# Altium PCB DPT2.3.PcbDoc
Units mm, origin at the board's own origin, x right, y up, seen from the top; angles counter-clockwise.
Board outline 79.3 x 71.2 mm, 4 copper layers (Top Layer, Layer 1, Layer 2, Bottom Layer), stack 1.491 mm thick; 139 components, 38 nets, 305 pads, 339 vias.
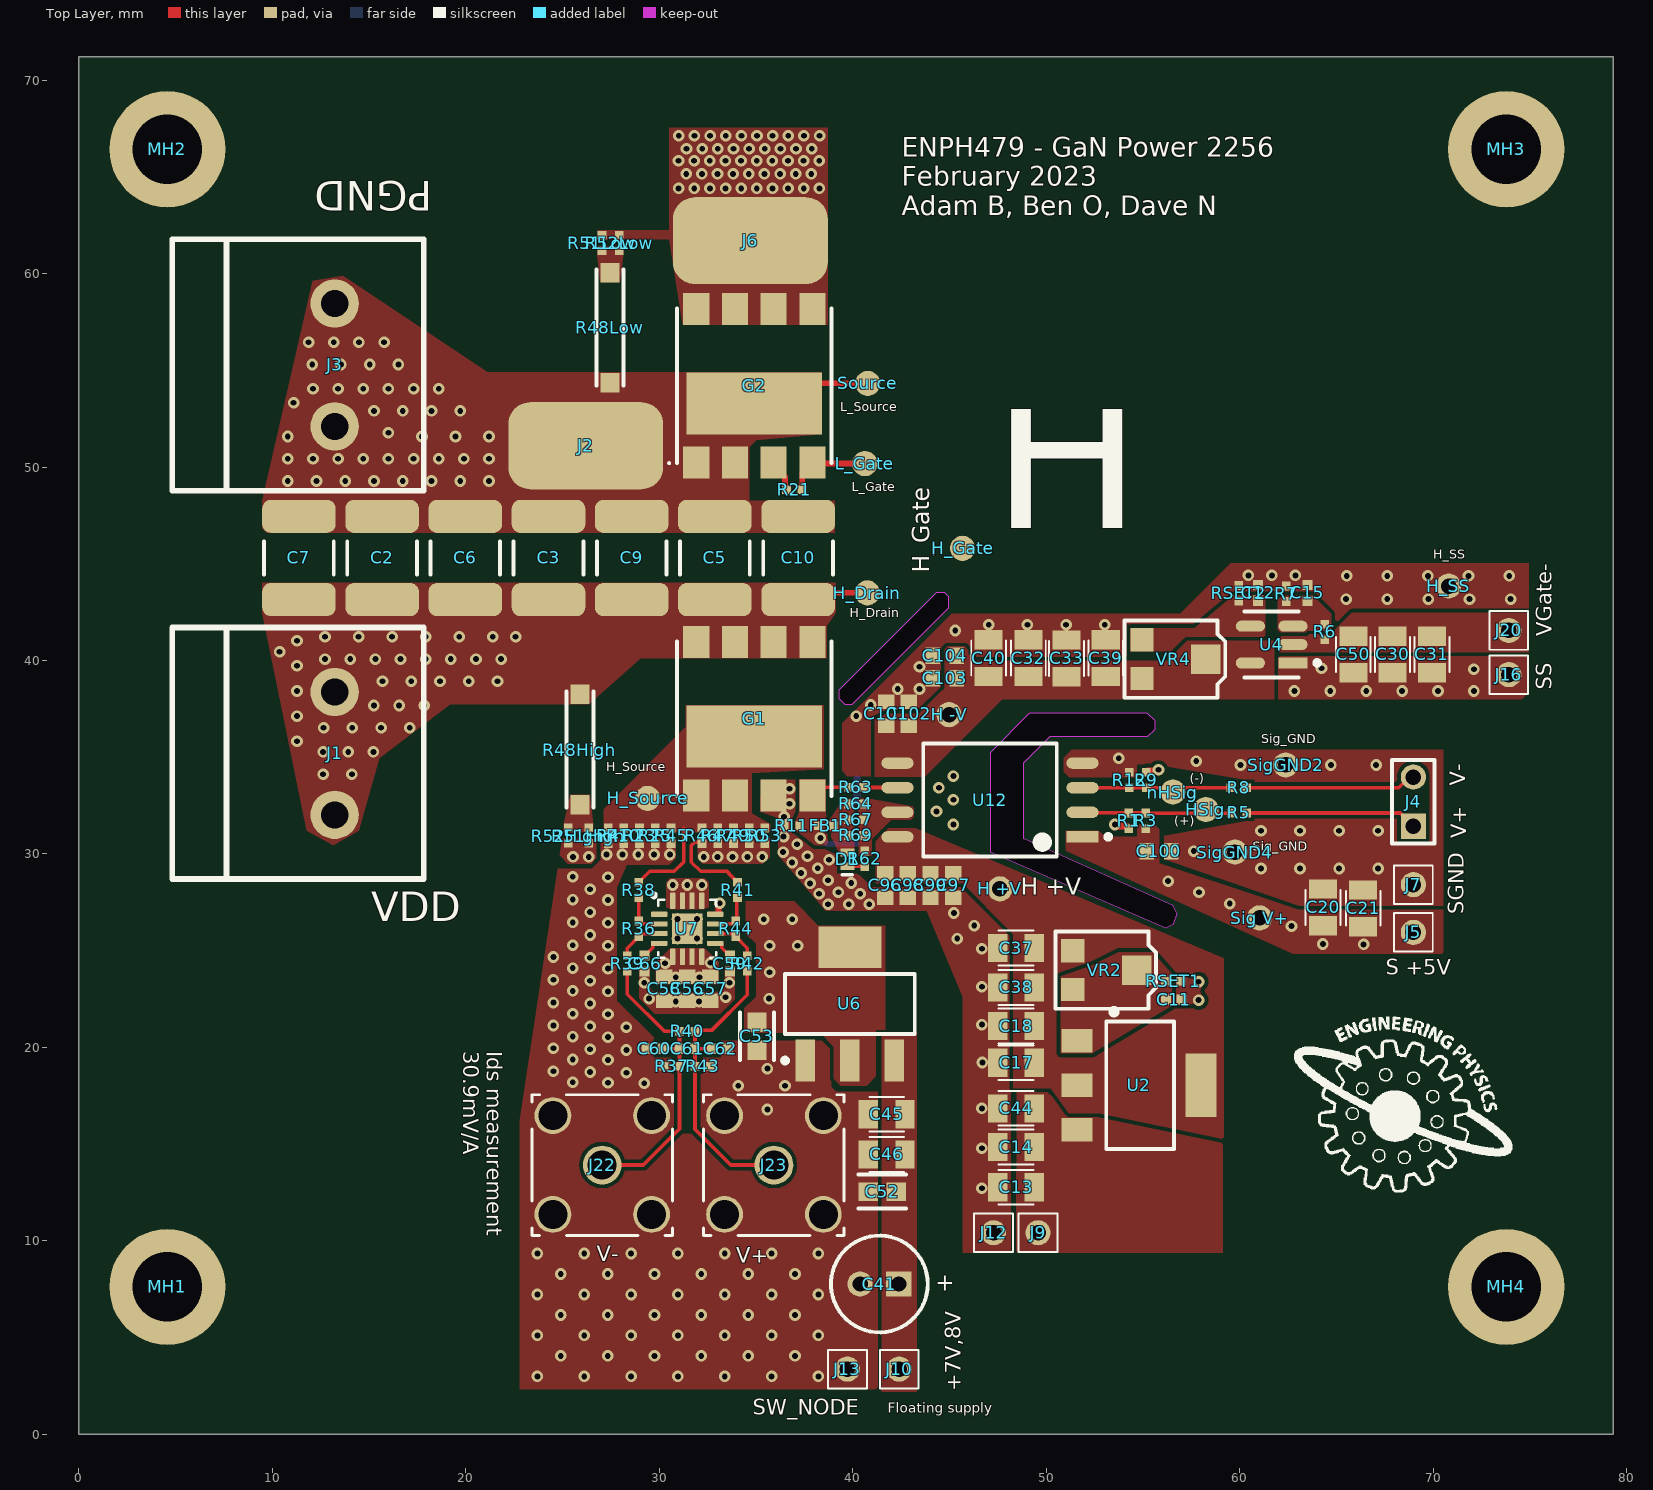
[diagram p0: Top Layer view]
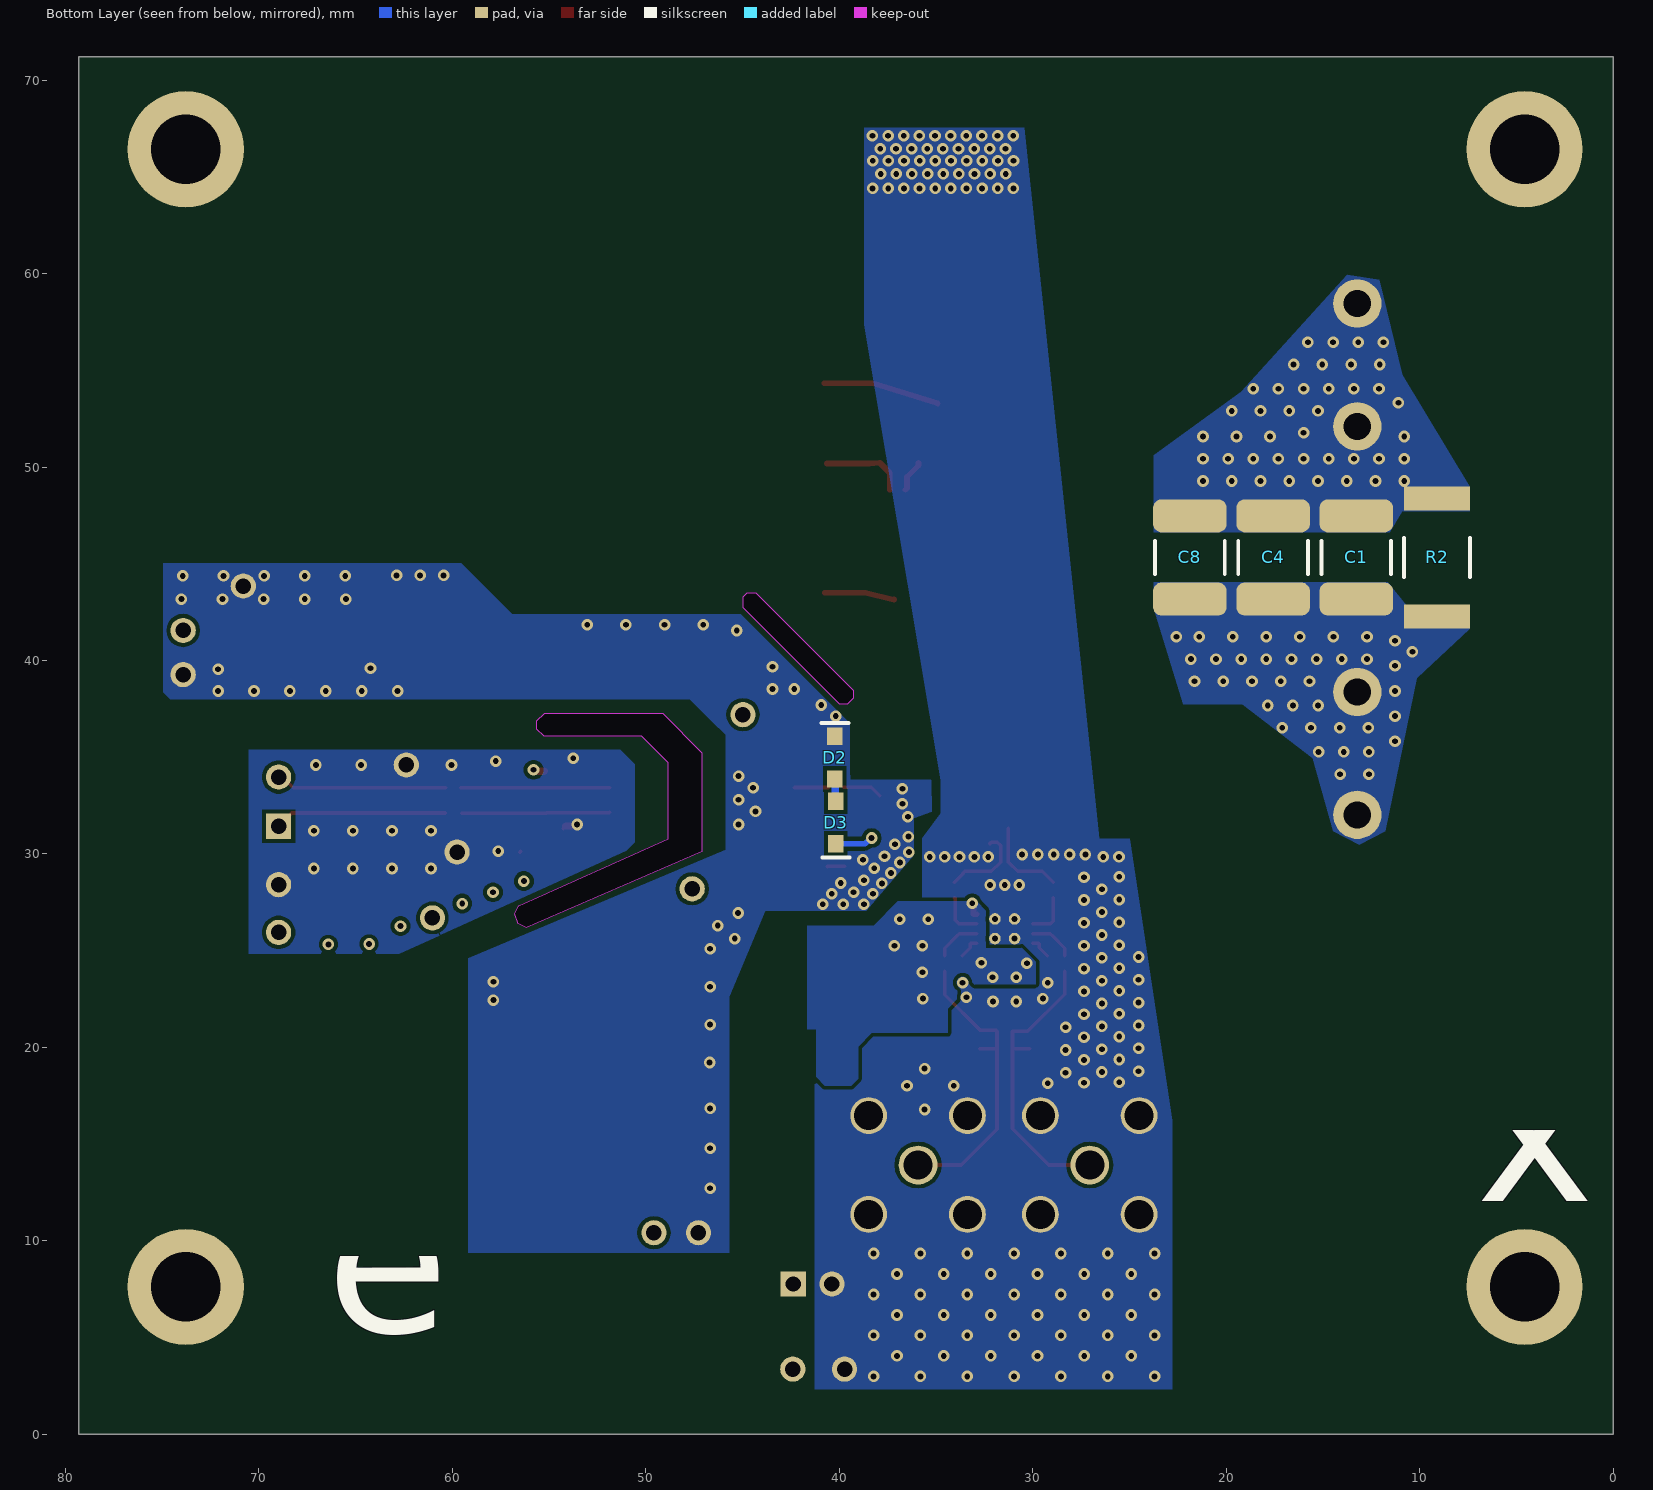
[diagram p1: Bottom Layer view, seen from below]
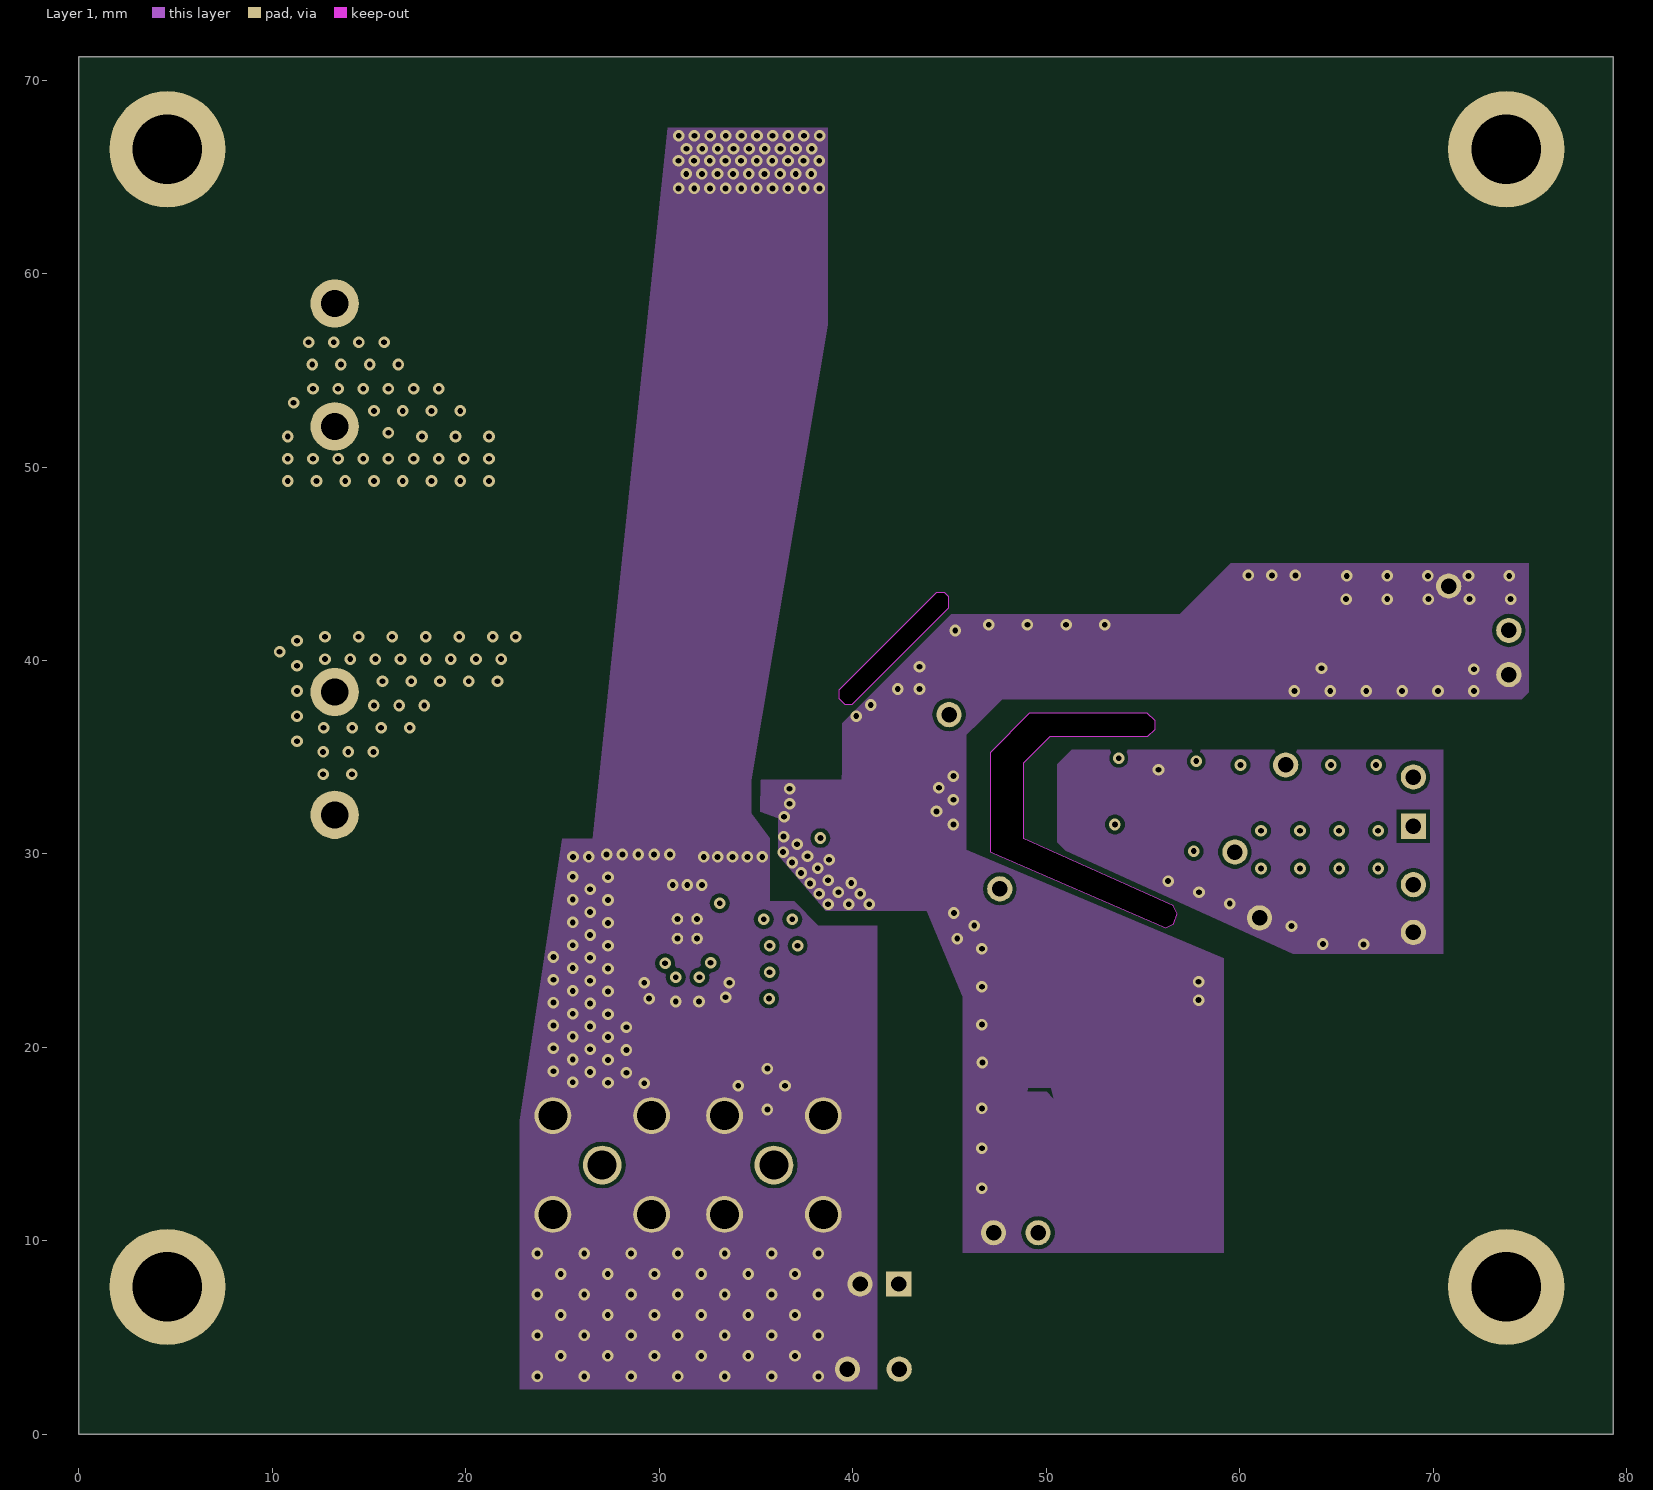
[diagram p2: Layer 1]
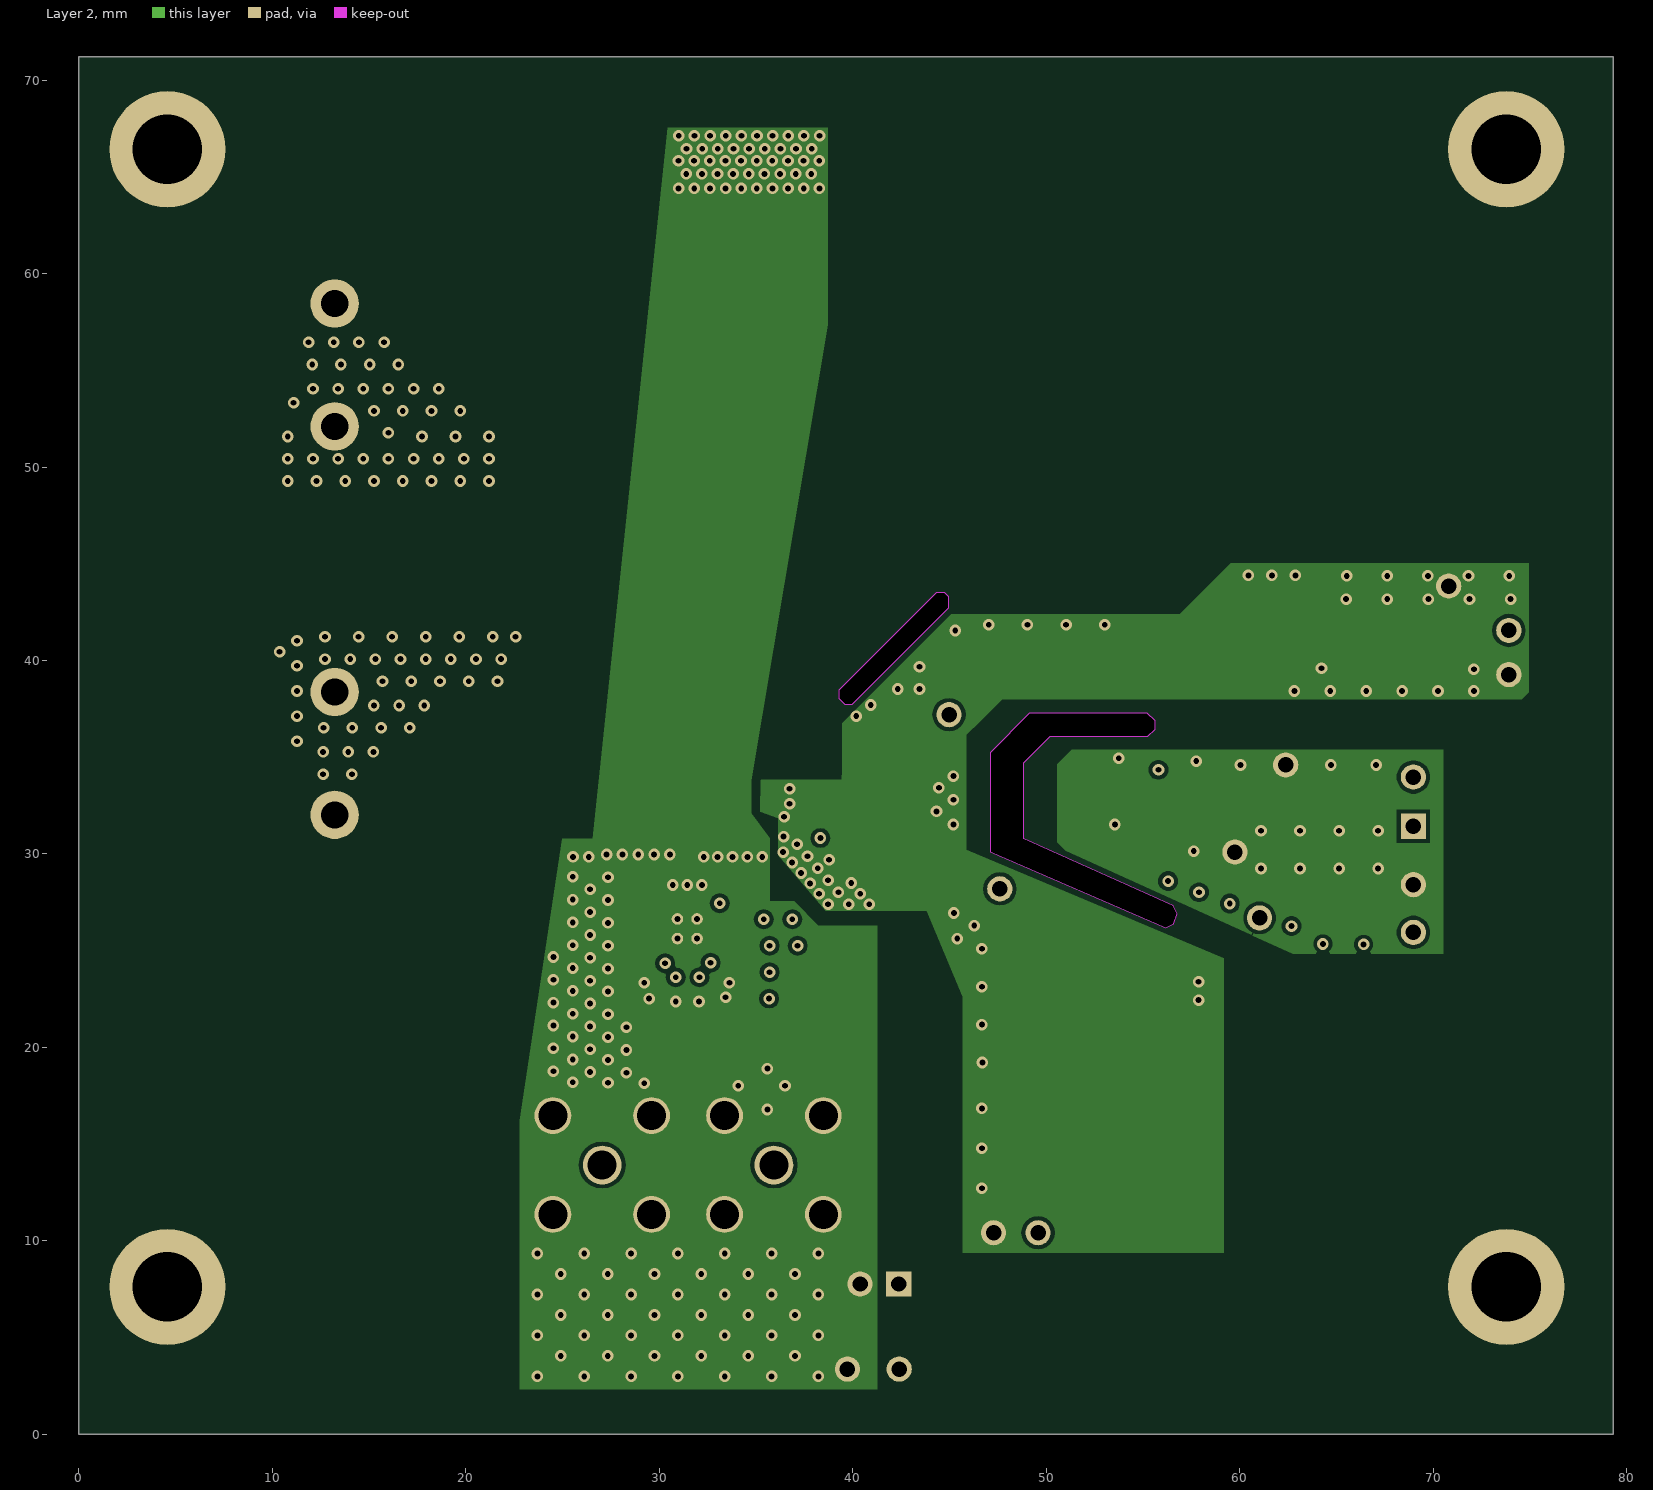
[diagram p3: Layer 2]
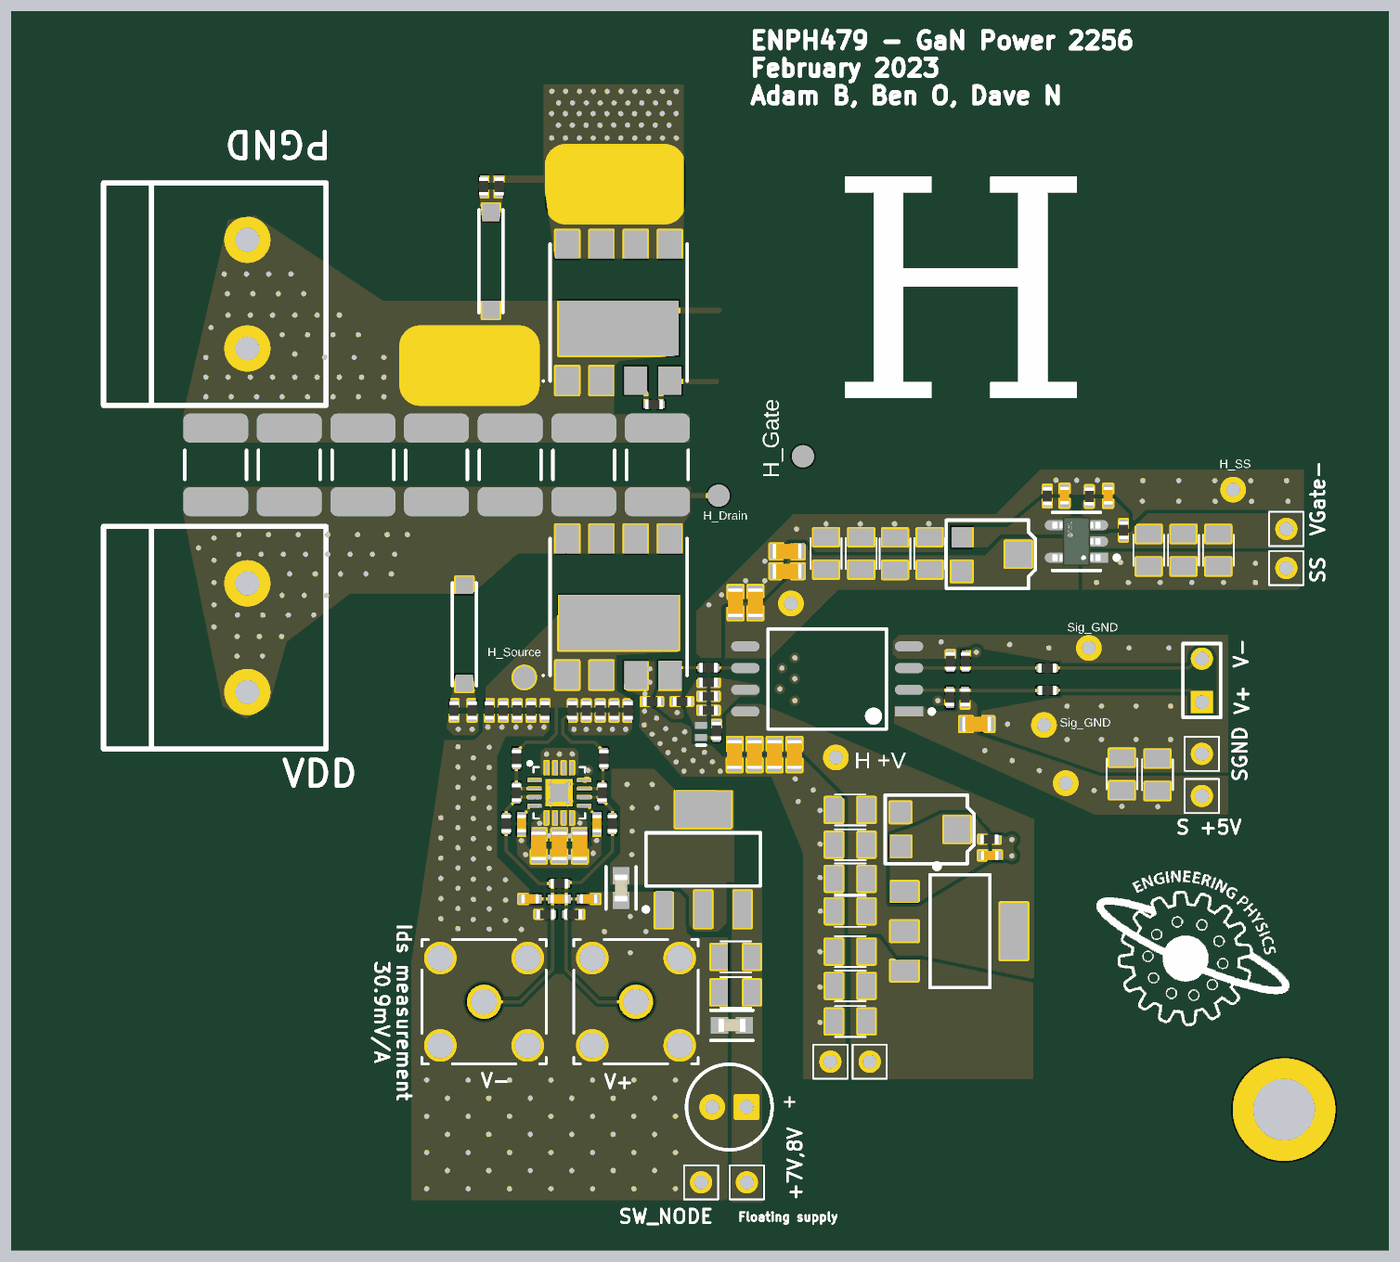
[diagram p4: 3D render of the assembled board from above, using the file's embedded part models]

## Layer stack, top to bottom
Top Solder: solder mask 0.0102, Solder Resist, Dk 3.5
Top Layer: signal copper 0.0356
Dielectric 2: prepreg 0.11, PP-006, Dk 4.1
Layer 1: signal copper 0.035
Dielectric 1: dielectric 1.13, FR-4, Dk 4.8
Layer 2: signal copper 0.035
Dielectric 3: prepreg 0.11, PP-006, Dk 4.1
Bottom Layer: signal copper 0.0356
Bottom Solder: solder mask 0.0102, Solder Resist, Dk 3.5

## Board outline
0,0 79.3,0 79.3,71.2 0,71.2
cut-out: 50.2,36.075 55.25,36.075 55.625,36.45 55.625,36.875 55.225,37.275 49.128,37.275 47.093,35.24 47.093,30.114 56.18,26.188 56.602,26.384 56.762,26.91 56.573,27.324 48.83,30.784 48.83,34.705
cut-out: 39.275,38.45 39.275,38.05 39.575,37.75 39.975,37.75 44.95,42.725 44.95,43.3 44.75,43.5 44.325,43.5

## Design rules (kind name [scope] priority, off if disabled: settings)
Clearance [All] p1: gap=0.2 ignorepadtopadclearanceinfootprint=TRUE
ComponentClearance [All] p1: gap=0.2 collisioncheckmode=3 verticalgap=0.254 showdistances=FALSE
DiffPairsRouting [All] p1: maxlimit=0.4 minlimit=0.2 mostfreqgap=0.254 toplayer_minwidth=0.15 toplayer_maxwidth=0.381 toplayer_prefwidth=0.381 midlayer1_minwidth=0.15 midlayer1_maxwidth=0.381 midlayer1_prefwidth=0.381 midlayer2_minwidth=0.15 midlayer2_maxwidth=0.381 midlayer2_prefwidth=0.381 bottomlayer_minwidth=0.15 bottomlayer_maxwidth=0.381 bottomlayer_prefwidth=0.381 maxuncoupledlength=12.7
HoleSize [All] p1: absolutevalues=TRUE maxlimit=6 minlimit=0.3 maxpercent=80.000 minpercent=20.000
HoleToHoleClearance [All] p1: gap=0.41 allowstackedmicrovias=TRUE
MatchedLengths [InDifferentialPairClass('All Differential Pairs')] p1: tolerance=2.54 checknetsindiffpair=TRUE checkdiffpairvsdiffpair=FALSE checkxsignals=FALSE checkothers=FALSE
MinimumAnnularRing [All] p1: minimumring=0.15
MinimumSolderMaskSliver [All] p1: minsoldermaskwidth=0.051
PlaneConnect [All] p1: planeconnectstyle=Direct reliefexpansion=0.508 reliefentries=4 reliefconductorwidth=0.254 reliefairgap=0.254
PolygonConnect [All] p1: connectstyle=Direct reliefconductorwidth=0.254 reliefentries=4 polygonreliefangle="90 Angle" airgapwidth=0.254
RoutingVias [All] p1: holewidth=0.3 width=0.5 viastyle="Through Hole" minholewidth=0.3 minwidth=0.5 maxholewidth=6 maxwidth=1.27
SilkToSolderMaskClearance [IsPad] p1: minsilkscreentomaskgap=0.1 clearancetoexposedcopper=TRUE
SolderMaskExpansion SolderMaskExpansion_Via [IsVia] p1: expansion=0.102 istentingtop=TRUE // tenting
SolderMaskExpansion [All] p2: expansion=0.102 istentingtop=FALSE
UnRoutedNet [All] p1: checkbadconnections=TRUE
Width [All] p1: maxlimit=10 minlimit=0.15 preferedwidth=0.185
22 further rules are at their usual default settings.

## Classes and differential pairs
component class HD: C96 C97 C98 C99 C100 C101 C102 C103 C104 D1 D2 D3 FB1 R62 R63 R64 R67 R69 U12
channel class HV_Measurements: High Low
component class High: R48High R51High R52High
component class Low: R48Low R51Low R52Low
component class DPT2.3: *1 *2 C1 C2 C3 C4 C5 C6 C7 C8 C9 C10 C11 C12 C13 C14 C15 C17 C18 C20 C21 C30 C31 C32 C33 C37 C38 C39 C40 C41 C44 C45 C46 C50 C52 C53 C56 C57 C58 C59 C60 C61 C62 C66 G1 G2 "H +V" "H -V" H_Drain H_Gate H_Source H_SS HSig J1 J2 J3 J4 J5 J6 J7 J9 J10 J12 J13 J16 J20 J22 J23 L_Gate MH1 MH2 MH3 MH4 nHSig R1 R2 R3 R4 R5 R6 R7 R8 R9 R10 R11 R12 R21 R23 R25 R36 R37 R38 R39 R40 R41 R42 R43 R44 R45 R46 R47 R49 R50 R53 RSET1 RSET2 "Sig V+" SigGND2 SigGND4 Source U2 U4 U6 U7 VR2 VR4

## Components (designator, comment, footprint, x,y, rotation, side; value= is the part's Value field where it differs from the comment)
C1 "CAP-1812" CAP_1812 13.275,45.325 r90 bottom value=0.1u
C2 "CAP-1812" CAP_1812 15.673,45.299 r90 top value=0.1u
C3 "CAP-1812" CAP_1812 24.274,45.299 r90 top value=0.1u
C4 "CAP-1812" CAP_1812 17.575,45.325 r90 bottom value=0.1u
C5 "CAP-1812" CAP_1812 32.875,45.299 r90 top value=0.1u
C6 "CAP-1812" CAP_1812 19.974,45.299 r90 top value=0.1u
C7 "CAP-1812" CAP_1812 11.376,45.3 r90 top value=0.1u
C8 "CAP-1812" CAP_1812 21.875,45.325 r90 bottom value=0.1u
C9 "CAP-1812" CAP_1812 28.575,45.299 r90 top value=0.1u
C10 "CAP-1812" CAP_1812 37.175,45.299 r90 top value=0.1u
C11 "CAP-0402" CAP_0402_HIGH 56.59,22.475 r0 top value=0.1u
C12 "CAP-0402" CAP_0402_HIGH 60.95,43.5 r90 top value=0.1u
C13 "CAP-0805" CAP_0805_MED 48.437,12.775 r180 top value=1u
C14 "CAP-0805" CAP_0805_MED 48.437,14.85 r180 top value=1u
C15 "CAP-0402" CAP_0402_HIGH 63.5,43.495 r90 top value=0.1u
C17 "CAP-0805" CAP_0805_MED 48.437,19.211 r180 top value=1u
C18 "CAP-0805" CAP_0805_MED 48.437,21.109 r180 top value=1u
C20 "CAP-0805" CAP_0805_MED 64.304,27.238 r90 top value=1u
C21 "CAP-0805" CAP_0805_MED 66.382,27.192 r90 top value=1u
C30 "CAP-0805" CAP_0805_MED 67.901,40.312 r270 top value=1u
C31 "CAP-0805" CAP_0805_MED 69.933,40.312 r270 top value=1u
C32 "CAP-0805" CAP_0805_MED 49.075,40.125 r90 top value=1u
C33 "CAP-0805" CAP_0805_MED 51.051,40.11 r90 top value=1u
C37 "CAP-0805" CAP_0805_MED 48.437,25.137 r180 top value=1u
C38 "CAP-0805" CAP_0805_MED 48.437,23.105 r180 top value=1u
C39 "CAP-0805" CAP_0805_MED 53.075,40.125 r90 top value=1u
C40 "CAP-0805" CAP_0805_MED 47.025,40.125 r90 top value=1u
C41 "PCAP-2MMx5MM" PCAP_2MM_5MM 41.375,7.775 r180 top value=100u
C44 "CAP-0805" CAP_0805_MED 48.437,16.856 r180 top value=1u
C45 "CAP-0805" CAP_0805_MED 41.75,16.55 r180 top value=1u
C46 "CAP-0805" CAP_0805_MED 41.75,14.475 r180 top value=1u
C50 "CAP-0805" CAP_0805_MED 65.869,40.312 r90 top value=1u
C52 "C0603C104K5RACTU" FP-C0603C-CF-IPC_B 41.526,12.55 r0 top value="0.10 μF"
C53 "C0603C104K5RACTU" FP-C0603C-CF-IPC_B 35.05,20.575 r270 top value="0.10 μF"
C56 "CAP-0603" CAP_0603_HIGH 31.445,23.035 r90 top value=1u
C57 "CAP-0603" CAP_0603_HIGH 32.645,23.035 r90 top value=1u
C58 "CAP-0603" CAP_0603_HIGH 30.245,23.035 r90 top value=1u
C59 "CAP-0402" CAP_0402_HIGH 33.645,24.335 r90 top value=1u
C60 "CAP-0402" CAP_0402_HIGH 29.745,19.935 r0 top value=1u
C61 "CAP-0402" CAP_0402_HIGH 31.445,19.935 r0 top value=1u
C62 "CAP-0402" CAP_0402_HIGH 33.145,19.935 r0 top value=1u
C66 "CAP-0402" CAP_0402_HIGH 29.245,24.335 r90 top value=1u
C96 "CAP-0603" CAP_0603_HIGH 41.683,28.375 r90 top value=1u
C97 "CAP-0603" CAP_0603_HIGH 45.184,28.375 r90 top value=1u
C98 "CAP-0603" CAP_0603_HIGH 42.85,28.375 r90 top value=1u
C99 "CAP-0603" CAP_0603_HIGH 44.017,28.375 r90 top value=1u
C100 "CAP-0603" CAP_0603_HIGH 55.825,30.15 r0 top value=1u
C101 "CAP-0603" CAP_0603_HIGH 41.733,37.25 r90 top value=1u
C102 "CAP-0603" CAP_0603_HIGH 42.9,37.25 r90 top value=1u
C103 "CAP-0603" CAP_0603_HIGH 44.75,39.083 r180 top value=1u
C104 "CAP-0603" CAP_0603_HIGH 44.75,40.25 r180 top value=1u
D1 "CDBQC0130L-HF" DIO_SOD-923F 39.725,29.725 r90 top
D2 "DIO_323F_ZENER" DIO_SOD-323F 40.225,34.975 r270 bottom value=6.2V
D3 "DIO_323F_ZENER" DIO_SOD-323F 40.175,31.625 r90 bottom value=6.2V
FB1 "RES-0402" RES_0402_HIGH 38.609,31.465 r180 top value=1k
G1 "GPI65030DFN" DFN_8X8 34.909,36.992 r90 top
G2 "GPI65030DFN" DFN_8X8 34.909,54.2 r90 top
"H +V" "Testpoint" Testpoint-Footprint-1#1 47.6,28.2 r90 top
"H -V" "Testpoint" Testpoint-Footprint-1#2 74.752,28.187 r0 top
H_Drain "Testpoint" Testpoint-Footprint-1#3 40.75,43.5 r90 top
H_Gate "Testpoint" Testpoint-Footprint-1#3 45.675,45.8 r90 top
H_Source "Testpoint" Testpoint-Footprint-1#3 29.4,32.875 r90 top
H_SS "Testpoint" Testpoint-Footprint-1#1 70.8,43.85 r90 top
HSig "Testpoint" Testpoint-Footprint-1#4 85.692,29.524 r180 top
J1 "TERM_1X2" J_TERM_BLK_1X2 13.225,35.2 r270 top
J2 "CONN_PAD" CONN_PAD 26.2,51.1 r180 top
J3 "TERM_1X2" J_TERM_BLK_1X2 13.225,55.275 r270 top
J4 "PIN_M_1X2" J_THT_2.54MM_1X2 68.975,33.975 r90 top
J5 "PIN_M" J_THT_1_PIN 68.975,25.95 r180 top
J6 "CONN_PAD" CONN_PAD 34.709,61.7 r180 top
J7 "PIN_M" J_THT_1_PIN 68.975,28.414 r180 top
J9 "PIN_M" J_THT_1_PIN 49.575,10.425 r270 top
J10 "PIN_M" J_THT_1_PIN 42.4,3.375 r180 top
J12 "PIN_M" J_THT_1_PIN 47.275,10.425 r270 top
J13 "PIN_M" J_THT_1_PIN 39.725,3.375 r0 top
J16 "PIN_M" J_THT_1_PIN 73.908,39.269 r90 top
J20 "PIN_M" J_THT_1_PIN 73.908,41.555 r90 top
J22 "SMA_VERT_F" SMA_VERT_F 27.05,13.925 r270 top
J23 "SMA_VERT_F" SMA_VERT_F 35.925,13.925 r270 top
L_Gate "Testpoint" Testpoint-Footprint-1#5 16.026,-8.008 r0 top
MH1 "Mounting Hole" "Mounting Hole-Footprint-1"#1 9.41,-34.09 r0 top
MH2 "Mounting Hole" "Mounting Hole-Footprint-1"#2 10.16,78.97 r0 top
MH3 "Mounting Hole" "Mounting Hole-Footprint-1"#3 99.16,82.295 r0 top
MH4 "Mounting Hole" "Mounting Hole-Footprint-1"#4 73.775,7.625 r0 top
nHSig "Testpoint" Testpoint-Footprint-1#6 85.918,34.044 r0 top
R1 "RES-0402" RES_0402_HIGH 54.257,31.716 r90 top value=1k
R2 "RES-2512" RES_2512_MED 9.101,45.325 r90 bottom value=1k
R3 "RES-0402" RES_0402_HIGH 55.146,31.716 r270 top value=1k
R4 "RES-0402" RES_0402_HIGH 27.356,30.942 r90 top value=1k
R5 "RES-0402" RES_0402_HIGH 59.957,32.12 r180 top value=1k
R6 "RES-0402" RES_0402_HIGH 64.4,41.475 r270 top value=1k
R7 "RES-0402" RES_0402_HIGH 62.4,43.45 r90 top value=1k
R8 "RES-0402" RES_0402_HIGH 59.95,33.425 r180 top value=1k
R9 "RES-0402" RES_0402_HIGH 55.171,33.82 r90 top value=1k
R10 "RES-0402" RES_0402_HIGH 28.168,30.942 r90 top value=1k
R11 "RES-0402" RES_0402_HIGH 36.858,31.465 r0 top value=1k
R12 "RES-0402" RES_0402_HIGH 54.282,33.82 r270 top value=1k
R21 "RES-0402" RES_0402_HIGH 36.975,48.825 r0 top value=1k
R23 "RES-0402" RES_0402_HIGH 28.981,30.942 r90 top value=1k
R25 "RES-0402" RES_0402_HIGH 29.794,30.942 r90 top value=1k
R36 "RES-0402" RES_0402_HIGH 28.945,26.135 r90 top value=1k
R37 "RES-0402" RES_0402_HIGH 30.645,19.035 r0 top value=1k
R38 "RES-0402" RES_0402_HIGH 28.945,28.135 r90 top value=1k
R39 "RES-0402" RES_0402_HIGH 28.345,24.335 r90 top value=1k
R40 "RES-0402" RES_0402_HIGH 31.445,20.835 r180 top value=1k
R41 "RES-0402" RES_0402_HIGH 34.045,28.135 r90 top value=1k
R42 "RES-0402" RES_0402_HIGH 34.545,24.335 r90 top value=1k
R43 "RES-0402" RES_0402_HIGH 32.245,19.035 r180 top value=1k
R44 "RES-0402" RES_0402_HIGH 33.945,26.135 r90 top value=1k
R45 "RES-0402" RES_0402_HIGH 30.607,30.942 r90 top value=1k
R46 "RES-0402" RES_0402_HIGH 32.207,30.942 r90 top value=1k
R47 "RES-0402" RES_0402_HIGH 33.02,30.942 r90 top value=1k
R48High "RES-2512-SIDE" RES_2512_SIDE 25.9,35.4 r270 top (schematic designator R48)
R48Low "RES-2512-SIDE" RES_2512_SIDE 27.45,57.2 r90 top (schematic designator R48)
R49 "RES-0402" RES_0402_HIGH 33.833,30.942 r90 top value=1k
R50 "RES-0402" RES_0402_HIGH 34.645,30.942 r90 top value=1k
R51High "RES-0402" RES_0402_HIGH 26.35,30.95 r90 top value=1k (schematic designator R51)
R51Low "RES-0402" RES_0402_HIGH 27.037,61.575 r270 top value=1k (schematic designator R51)
R52High "RES-0402" RES_0402_HIGH 25.3,30.95 r90 top value=1k (schematic designator R52)
R52Low "RES-0402" RES_0402_HIGH 27.925,61.575 r270 top value=1k (schematic designator R52)
R53 "RES-0402" RES_0402_HIGH 35.458,30.942 r90 top value=1k
R62 "RES-0402" RES_0402_HIGH 40.625,29.75 r270 top value=1k
R63 "RES-0402" RES_0402_HIGH 40.159,33.45 r180 top value=1k
R64 "RES-0402" RES_0402_HIGH 40.159,32.586 r180 top value=1k
R67 "RES-0402" RES_0402_HIGH 40.159,31.775 r180 top value=1k
R69 "RES-0402" RES_0402_HIGH 40.159,30.959 r180 top value=1k
RSET1 "RES-0402" RES_0402_HIGH 56.565,23.425 r180 top value=1k
RSET2 "RES-0402" RES_0402_HIGH 59.95,43.475 r90 top value=1k
"Sig V+" "Testpoint" Testpoint-Footprint-1#7 67.711,24.363 r0 top locked
SigGND2 "Testpoint" Testpoint-Footprint-1#1 62.375,34.6 r0 top
SigGND4 "Testpoint" Testpoint-Footprint-1#1 59.75,30.1 r0 top
Source "Testpoint" Testpoint-Footprint-1#8 39.289,-15.498 r90 top
U2 "AZ1117H-ADJTRE1" SOT-223 54.8,18.05 r270 top
U4 "MAX1735EUK50+T" FP-U5-2-IPC_B 61.65,40.825 r180 top
U6 "AZ1117IH-5.0TRG1" SOT230P700X180-4N 39.85,22.25 r90 top
U7 "THS4508RGTT" QFN-16 31.445,26.135 r0 top
U12 "ADUM4121ARIZ-RL" SOIC-8_WIDE 47.093,32.79 r180 top
VR2 "RES_POT_JLEAD" TRIM_J-LEAD 53.175,24 r270 top value=500
VR4 "RES_POT_JLEAD" TRIM_J-LEAD 56.75,40.075 r270 top value=500

## Footprints (in the part's own frame and the unit in brackets; to place one, negate y for a bottom-side part, rotate by r counter-clockwise, add the part's x,y. Pads: shape width x height; smd on the part's side, far side on the other; paste and mask are expansions set on the pad)
CAP_0402_HIGH [mm] "SMD Capacitor 0402 (1005 Metric) - High Density"
  rect 0.52x0.52 smd: 1(-0.41,0) 2(0.41,0)
  body extent -0.53,-0.28 0.53,0.28, height 0.55
CAP_0603_HIGH [mm] "SMD Capacitor 0603 (1608 Metric) - High Density"
  rect 0.75x0.85 smd: 1(-0.625,0) 2(0.625,0)
  body extent -0.85,-0.45 0.85,0.45, height 0.9
CAP_0805_MED [mm] "SMD Capacitor 0805 (2013 Metric) - Medium Density"
  rect 1x1.45 smd: 1(-0.95,0) 2(0.95,0)
  silkscreen extent -0.9,-0.9 0.9,0.9, body extent -1.35,-0.8 1.35,0.8, height 0.25
CAP_1812 [mm] "Non Polarized SMD Capacitor 1812 (4532 Metric)"
  rrect50% 1.7x3.8 smd paste+0 mask+0: 1(-2.15,0) 2(2.15,0)
  silkscreen extent -0.85,-1.8 0.85,1.8, body extent -2.25,-1.7 2.25,1.7, height 0.6
CONN_PAD [mm] "Generic Exposed Pad for connecting a Load (30A out)"
  rrect50% 8x4.5 smd paste-2.25: 1(0,0)
DFN_8X8 [mm] "DFN, 4-Leads, Body 8.00x8.00mm, Pitch 7.95mm, IPC Medium Density"
  rect 1.65x1.35 smd: 1(-3.975,3) 2(-3.975,1) 3(-3.975,-1) 4(-3.975,-3) 5(3.975,-3) 6(3.975,-1) 7(3.975,1) 8(3.975,3)
  rect 3.2x7 smd: 9(-0.91,0)
  silkscreen extent -4.05,-4 4,4.45, body extent -4,-4 4,4, height 0.45
DIO_SOD-323F [mm] "SOD-323F Small outline diode"
  rect 0.9x0.8 smd paste+0 mask+0: 1(-1.1,0) 2(1.1,0)
  silkscreen extent -1.8,-0.7 -1.8,0.7, body extent -1.1,-0.9 1.1,0.9, height 0.25
DIO_SOD-923F [mil] "SOD-923F Small outline diode"
  rect 15.5x28 smd paste+0 mask+0: 1(-13.75,0) 2(13.75,0)
  silkscreen extent -31,-10 -31,10, body extent -20,-12 20,12, height 10
FP-C0603C-CF-IPC_B [mm]
  rect 1.007x0.958 smd paste+0 mask+0: 1(-0.726,0) 2(0.726,0)
  silkscreen extent -1.23,-0.88 1.23,0.88, body extent -1.48,-0.73 1.48,0.73, height 0.25
FP-U5-2-IPC_B [mm]
  rect 1.505x0.576 smd paste+0 mask+0: 1(-1.1,0.95)
  rrect100% 1.505x0.576 smd paste+0 mask+0: 2(-1.1,0) 3(-1.1,-0.95) 4(1.1,-0.95) 5(1.1,0.95)
  silkscreen extent -2.48,-1.7 1.4,1.7, body extent -2.1,-1.7 2.1,1.7, height 0.25
J_TERM_BLK_1X2 [mm] "PCB 1X2 Terminal block"
  round 2.5 hole 1.4: 1(-3.175,0) 2(3.175,0)
  silkscreen extent -6.5,-8.4 6.5,4.6, body extent -6.4,-8.3 6.4,4.5, height 21
J_THT_1_PIN [mm] "M/F Pin Header 1 Pin"
  round 1.3 hole 0.8 paste-1000 mask+0: 1(0,0)
  silkscreen extent -1,-1 1,1, body extent -1.02,-1 1.02,1, height 0.25
J_THT_2.54MM_1X2 [mm] "M/F Pin Header 2.54mm pitch, 1X2"
  rect 1.3x1.3 hole 0.8 paste-1000 mask+0: 1(-2.54,0)
  round 1.3 hole 0.8 paste-1000 mask+0: 2(0,0)
  silkscreen extent -3.43,-1.1 0.89,1.1, body extent -3.43,-1.2 1.02,1.2, height 0.25
"Mounting Hole-Footprint-1"#1 [mm]
  round 6 hole 3.6: 1(-4.835,41.715)
"Mounting Hole-Footprint-1"#2 [mm]
  round 6 hole 3.6: 1(-5.585,-12.545)
"Mounting Hole-Footprint-1"#3 [mm]
  round 6 hole 3.6: 1(-25.385,-15.87)
"Mounting Hole-Footprint-1"#4 [mm]
  round 6 hole 3.6: 1(0,0)
PCAP_2MM_5MM [mm] "Polarized Capacitor THT - 2-Leads, Dia 5mm, Pin Spacing 2mm"
  rect 1.3x1.3 hole 0.8: 1(-1,0)
  round 1.3 hole 0.8: 2(1,0)
  silkscreen extent -2.5,-2.5 2.5,2.5, body extent -2.5,-2.5 2.45,2.5, height 12
QFN-16 [mm] "QFN-16  3mmX3mm"
  rrect25% 0.86x0.26 smd paste-0.032 mask+0.05: 1(-1.45,0.75) 2(-1.45,0.25) 3(-1.45,-0.25) 4(-1.45,-0.75) 9(1.45,-0.75) 10(1.45,-0.25) 11(1.45,0.25) 12(1.45,0.75)
  rrect25% 0.26x0.86 smd paste-0.032 mask+0.05: 5(-0.75,-1.45) 6(-0.25,-1.45) 7(0.25,-1.45) 8(0.75,-1.45) 13(0.75,1.45) 14(0.25,1.45) 15(-0.25,1.45) 16(-0.75,1.45)
  rect 1.6x1.6 smd paste-2 mask+0.05: 17(0,0)
  round 0.6 hole 0.3 mask+0.102: 18(-0.508,0.508) 19(0.508,0.508) 20(0.508,-0.508) 21(-0.508,-0.508)
  silkscreen extent -1.82,-1.5 1.5,1.82, body extent -1.5,-1.5 1.5,1.5, height 2
RES_0402_HIGH [mm] "SMD Resistor 0402 (1005 Metric) - High Density"
  rect 0.45x0.45 smd: 1(-0.4,0) 2(0.4,0)
  body extent -0.53,-0.28 0.53,0.28, height 0.4
RES_2512_MED [mm] "SMD Resistor 2512 (6432 Metric) - Medium Density"
  rect 1.25x3.4 smd: 1(-3.05,0) 2(3.05,0)
  silkscreen extent -1,-1.7 1,1.7, body extent -3.05,-1.7 3.05,1.7, height 0.25
RES_2512_SIDE [mm] "SMD Resistor 2512 (6432 Metric) - On its side"
  rect 1x1 smd: 1(-2.85,0) 2(2.85,0)
  silkscreen extent -3,-0.7 3,0.7, body extent -3.05,-0.7 3.05,0.7, height 0.25
SMA_VERT_F [mil] "SMA Vertical Connector, Female"
  round 79 hole 59: 1(0,0)
  round 75 hole 59.06 mask+0: 2(-100.5,100.5) 3(100.5,100.5) 4(-100.5,-100.5) 5(100.5,-100.5)
  silkscreen extent -143,-143 143,143, body extent 0,0 10,10, height 10
SOIC-8_WIDE [mm] "SOIC-8 Wide body"
  rect 1.655x0.582 smd paste+0 mask+0: 1(-4.781,1.905)
  rrect100% 1.655x0.582 smd paste+0 mask+0: 2(-4.781,0.635) 3(-4.781,-0.635) 4(-4.781,-1.905) 5(4.781,-1.905) 6(4.781,-0.635) 7(4.781,0.635) 8(4.781,1.905)
  silkscreen extent -6.23,-2.93 3.45,2.93, body extent -4.83,-3.18 4.83,3.18, height 0.25
SOT230P700X180-4N [mm] "SOT223, 4-Leads, Body 6.50x7.00mm (avg), Pitch 2.30mm, IPC Medium Density"
  rect 2.15x1 smd: 1(-2.925,2.3) 2(-2.925,0) 3(-2.925,-2.3)
  rect 2.15x3.25 smd: 4(2.925,0)
  silkscreen extent -3.05,-3.35 1.55,3.47, body extent -1.85,-3.35 1.85,3.35, height 1.8
SOT-223 [mm] "SOT-223"
  rect 1.2x1.6 smd: 1(-2.3,-3.2) 2(0,-3.2) 3(2.3,-3.2)
  rect 3.3x1.6 smd: 4(0,3.2)
  silkscreen extent -3.94,-1.7 3.3,1.8, body extent -3.43,-3.3 3.56,3.18, height 0.25
Testpoint-Footprint-1#1 [mm]
  round 1.3 hole 0.8: 1(0,0)
Testpoint-Footprint-1#2 [mm]
  round 1.3 hole 0.8: 1(-29.777,9.013)
Testpoint-Footprint-1#3 [mm]
  round 1.3 smd: 1(0,0)
Testpoint-Footprint-1#4 [mm]
  round 1.3 smd: 1(27.442,-2.776)
Testpoint-Footprint-1#5 [mm]
  round 1.3 smd: 1(24.599,58.183)
Testpoint-Footprint-1#6 [mm]
  round 1.3 smd: 1(-29.368,-0.844)
Testpoint-Footprint-1#7 [mm]
  round 1.3 hole 0.8: 1(-6.686,2.337)
Testpoint-Footprint-1#8 [mm]
  round 1.3 smd: 1(69.823,-1.486)
TRIM_J-LEAD [mm] "3mm SMD J-Lead Trim Pot"
  rect 1.2x1.2 smd: 1(-1,-1.8) 2(1,-1.8)
  rect 1.524x1.524 smd: 3(0,1.5)
  silkscreen extent -2,-2.7 2,2.5, body extent -1.9,-2.6 1.9,1.9, height 5

## Part data
C1 C2 C3 C4 C5 C6 C7 C8 C9 C10: library part CMP-001-00088-2, "Non polarized SMD capacitor - 1812 (4532 Metric)", Package=1812
C11 C12 C15 C59 C60 C61 C62 C66: library part CMP-001-00083-3, "Non polarized SMD capacitor - 0402 (1005 Metric)", Package=0402
C13 C14 C17 C18 C20 C21 C30 C31 C32 C33 C37 C38 C39 C40 C44 C45 C46 C50: library part CMP-001-00086-3, "Non polarized SMD capacitor - 0805 (1608 Metric)", Package=0805
C41: library part CMP-001-00091-1, "Polarized THT capacitor - Radial can, 2mm lead spacing, 5mm diameter"
C52 C53: library part CMP-2006-03061-2, "CAP CER 0.1UF 50V X7R 0603", Capacitance="0.10 μF", Manufacturer=KEMET, Package=C0603C-CF, Temperature="-55°C to +125°C", Temperature Characteristic=X7R, Temperature Coefficient=30ppm/°C, Temperature Range High=+125°C, Temperature Range Low=-55°C, Tolerance=0.1, Voltage Rating="50 V", Automotive=Yes, Automotive Grade="Grade 1", Category=Cap, ComponentLink2Description=Datasheet, ComponentLink2URL=https://api.kemet.com/component-edge/download/datasheet/C0603C100J5GACAUTO.pdf, Device Class L1="Passive Components", Device Class L2=Capacitors, Device Class L3="Ceramic Capacitors", Digikey Description="CAP CER 0.1UF 50V X7R 0603", Height=0.87mm, Lead Free=Yes, Manufacturer Part Number=C0603C104K5RACTU, Material=Ceramic, Octopart=https://octopart.com/c0603c104k5ractu-kemet-139244, RoHS=TRUE
C56 C57 C58 C96 C97 C98 C99 C100 C101 C102 C103 C104: library part CMP-001-00084-2, "Non polarized SMD capacitor - 0603 (1608 Metric)", Package=0603
D1: library part CMP-004-00031-2, "Low VF SMD Schottky Barrier Diode", Package=SOD-923F
D2 D3: library part CMP-004-00032-1, "Generic SOD-323F Zener diode", Package=SOD-323F
FB1 R1 R3 R4 R5 R6 R7 R8 R9 R10 R11 R12 R21 R23 R25 R36 R37 R38 R39 R40 R41 R42 R43 R44 R45 R46 R47 R49 R50 R51High R51Low R52High R52Low R53 R62 R63 R64 R67 R69 RSET1 RSET2: library part CMP-009-00177-2, "SMD Resistor - 0402 (1005 Metric)", Package=0402
G1 G2: library part CMP-023-000000-5, "650V 15A GaN Enhancement mode Transistor", Package=DFN8X8
"H +V" "H -V" H_Drain H_Gate H_Source H_SS HSig L_Gate nHSig "Sig V+" SigGND2 SigGND4 Source: library part CMP-001-0000-5, "testpoint for circuit"
J1 J3: library part CMP-002-00071-1, "Terminal Block 1X2, 6.35mm pitch"
J2 J6: library part CMP-002-00074-4, "Solderable Connection Pad"
J4: library part CMP-002-00073-2, "Male Pin 2.54mm pitch 1X2"
J5 J7 J9 J10 J12 J13 J16 J20: library part CMP-002-00072-1, "Male Pin, 1 Pin"
J22 J23: library part CMP-025-000000-6, "SMA connector, Vertical, Female", Package=SMA
MH1 MH2 MH3 MH4: library part CMP-032-000006-1
R2: library part CMP-009-00182-3, "SMD Resistor - 2512 (6432 Metric)", Package=2512
R48High R48Low: library part CMP-009-00183-1, "SMD Resistor - 2512 (6432) On It's Side", Package=2512
U2: library part CMP-019-00050-1, "IC REG LINEAR POS ADJ 1A SOT223", Package=SOT223
U4: library part CMP-05721-000044-1, "IC REG LIN NEG ADJ 200MA SOT23-5"
U6: library part CMP-032-000005-2, "https://www.digikey.ca/en/products/detail/diodes-incorporated/AZ1117IH-5-0TRG1/5699673"
U7: library part CMP-027-000000-11, "WIDEBAND, LOW NOISE, LOW DISTORTION FULLY DIFFERENTIAL AMPLIFIER", Package=QFN3X3
U12: library part CMP-019-000000-4, "DGTL ISO 5KV 1CH GATE DRVR 8SOIC", Package="8-SOIC WIDE"
VR2 VR4: library part CMP-009-00181-2, "Potentiometer, J-Lead Trim Pot"

## Via types
v1: diameter 0.6, hole 0.3, Top Layer to Bottom Layer, tented both sides, 339 vias

## Nets (pads, with @x,y where several pads share a name; then routed paths per layer and width w, separated by ;. In a path a pad name is that pad's centre, name@x,y a point inside that pad or via, vN(x,y) a via of type N, cw(c..) or ccw(c..) an arc to the next point about the centre after c; other vN are vias at no path point)
+5: C53.1 C56.2 C57.2 C58.2 U6.2 U6.4 U7.5 U7.6 U7.7 U7.8 U7.12 | length 0.7
  Top Layer w0.3: U7.12 33.048,26.885 33.068,26.905 33.068,27.393 v1(33.125,27.45)
  other v1: 35.675,22.525 30.85,23.625 32.075,23.625 35.7,23.892 30.3,24.35 32.65,24.375 35.7,25.258 37.15,25.258 35.4,26.625 36.875,26.625
+5_SIG: "Sig V+.1" C20.1 C21.1 C100.1 J5.1 R3.2 R9.2 U12.1 | length 0.7
  Top Layer w0.185: R9.2 R9.2@55.236,34.285 ; v1@55.735,34.285 v1(55.8,34.35)
  Top Layer w0.385: R9.2@55.236,34.285 v1@55.735,34.285
  other v1: 66.4,25.325 64.3,25.35 62.675,26.275 59.487,27.437 57.894,28.019 56.3,28.6
+VIN: C41.1 C45.1 C46.1 C52.2 J10.1 U6.3
GND_SIG: C20.2 C21.2 C100.2 J7.1 R1.1 R12.1 SigGND2.1 SigGND4.1 U12.4 | length 0.9
  Top Layer w0.185: v1(53.55,31.525) v1@53.629,31.446 ; R1.1@54.127,31.446 R1.1 ; C100.2 C100.2@56.5,30.1
  Top Layer w0.385: v1@53.629,31.446 R1.1@54.127,31.446
  other v1: 61.1,29.25 63.117,29.25 65.133,29.25 67.15,29.25 57.625,30.15 61.1,31.2 63.117,31.2 65.133,31.2 67.15,31.2 60.037,34.6 64.712,34.6 67.05,34.6 57.75,34.8 53.75,34.95
H_+V: "H +V.1" C17.1 C18.1 C37.1 C38.1 C96.2 C97.2 C98.2 C99.2 U2.2 U2.4 U12.8 VR2.1
H_+VIN: C13.1 C14.1 C44.1 J9.1 U2.3
H_-V: "H -V.1" C32.1 C33.1 C39.1 C40.1 C101.1 C102.1 C103.1 C104.1 U4.5 U12.5 VR4.2 VR4.3
H_-VIN: C30.1 C31.1 C50.2 J20.1 R6.2 U4.2
H_Drain: C1.1 C2.1 C3.1 C4.1 C5.1 C6.1 C7.1 C8.1 C9.1 C10.1 G1.5 G1.6 G1.7 G1.8 H_Drain.1 J1.1 J1.2 R2.1 R48High.1 | length 3.6
  Top Layer w0.3: C10.1 38.65,43.5 H_Drain.1
  other v1: 12.625,34.125 14.111,34.125 12.625,35.275 13.925,35.275 15.225,35.275 11.275,35.825 12.65,36.525 14.136,36.525 15.621,36.525 17.107,36.525 11.275,37.125 15.25,37.675 16.55,37.675 17.85,37.675 11.275,38.425 15.696,38.925 17.182,38.925 18.668,38.925 20.154,38.925 21.639,38.925 11.275,39.725 12.725,40.075 14.025,40.075 15.325,40.075 16.625,40.075 17.925,40.075 19.225,40.075 20.525,40.075 21.825,40.075 10.375,40.45 11.275,41.025 12.725,41.225 14.458,41.225 16.192,41.225 17.925,41.225 19.658,41.225 21.392,41.225 22.575,41.225
H_Gate: D3.1 FB1.2 G1.4 R11.2 R63.2 | length 4
  Top Layer w0.185: G1.4 38.342,33.45 R63.2
  Bottom Layer w0.3: v1(38.325,30.825) 38.355,30.808 cw(c38.206,30.548) 38.406,30.771 38.669,30.537 cw(c38.469,30.313) 38.68,30.526 ; 38.681,30.525 D3.1
H_Source: G1.1 G1.2 G1.9 H_Source.1 R4.2 R10.2 R23.2 R25.2 R38.2 R45.2 R46.2 R47.2 R49.2 R50.2 R53.2 | length 4.5
  Top Layer w0.185: R38.2 29.51,29.1 30.775,29.1 31.275,29.6 31.275,31.325
H_SS: C11.2 C12.2 C13.2 C14.2 C15.2 C17.2 C18.2 C30.2 C31.2 C32.2 C33.2 C37.2 C38.2 C39.2 C40.2 C44.2 C50.1 C96.1 C97.1 C98.1 C99.1 C101.2 C102.2 C103.2 C104.2 D2.1 G1.3 H_SS.1 J12.1 J16.1 R7.2 R11.1 RSET1.1 RSET2.2 U4.1
  other v1: 46.675,12.725 46.675,14.787 46.675,16.85 46.7,19.225 46.675,21.183 57.875,22.45 46.675,23.142 57.875,23.4 46.675,25.1 45.4,25.625 46.275,26.3 45.225,26.95 38.725,27.4 39.787,27.4 40.85,27.4 38.26,27.94 40.387,27.95 39.255,28.02 37.795,28.48 39.925,28.5 38.722,28.64 37.33,29.02 38.19,29.26 36.865,29.56 38.775,29.7 37.657,29.88 36.4,30.1 37.125,30.5 36.425,30.9 45.2,31.525 36.45,31.925 44.325,32.2 36.734,32.6 45.2,32.8 36.734,33.375 44.45,33.425 45.2,34.025 40.175,37.125 40.925,37.7 62.825,38.425 64.68,38.425 66.535,38.425 68.39,38.425 70.245,38.425 72.1,38.425 42.325,38.525 43.45,38.525 72.1,39.55 64.225,39.6 43.45,39.675 45.3,41.55 47.025,41.85 49.025,41.85 51.025,41.85 53.025,41.85 65.5,43.175 67.625,43.175 69.75,43.175 71.875,43.175 74,43.175 65.526,44.375 67.626,44.375 69.725,44.375 71.825,44.375 73.925,44.375 60.45,44.4 61.663,44.4 62.875,44.4
NetC11_1: C11.1 RSET1.2 U2.1 VR2.2 VR2.3
NetC12_1: C12.1 RSET2.1 U4.4 VR4.1
NetC15_1: C15.1 R6.1 R7.1 U4.3
NetC59_2: C59.2 U7.9 | length 1.1
  Top Layer w0.185: U7.9 33.195,25.385 33.232,25.348 33.232,25.158 C59.2
NetC60_2: C60.2 C61.1 J22.1 R37.2 R39.1 R40.2 | length 15.4
  Top Layer w0.185: J22.1 29.175,13.925 31.045,15.795 R37.2 31.045,19.935 R40.2 30.265,20.835 28.345,22.755 R39.1 ; C60.2 C61.1
NetC61_2: C61.2 C62.1 J23.1 R40.1 R42.1 R43.2 | length 15.5
  Top Layer w0.185: C61.2 C62.1 ; R42.1 34.545,22.72 32.724,20.899 31.909,20.899 R40.1 31.845,19.935 R43.2 31.845,15.78 33.7,13.925 J23.1
NetC66_2: C66.2 U7.4 | length 1.1
  Top Layer w0.185: C66.2 29.657,25.158 29.657,25.348 29.695,25.385 U7.4
NetD1_1: D1.1 R62.2 | length 0.9
  Top Layer w0.185: D1.1 39.738,29.363 40.612,29.363 R62.2
NetD1_2: D1.2 FB1.1 R64.2 R67.2 R69.2
NetD2_2: D2.2 D3.2 | length 1.2
  Bottom Layer w0.385: D3.2 40.2,32.75 40.2,33.85 D2.2
NetG2_2: G2.3 R21.1 | length 1.7
  Top Layer w0.3: G2.3 35.909,50.075 36.5,49.484 36.5,48.9 R21.1
NetG2_3: G2.4 L_Gate.1 R21.2 | length 4.3
  Top Layer w0.3: R21.2 37.384,48.834 37.384,49.7 G2.4 38.434,50.175 L_Gate.1
NetHSig_1: HSig.1 R1.2 R3.1 R5.2 U12.2 | length 7.6
  Top Layer w0.185: U12.2 51.89,32.138 R3.1@55.146,32.138 ; R3.1 R5.2@59.5,32.116
NetJ4_1: J4.1 R5.1 | length 8.9
  Top Layer w0.185: R5.1@60.375,32.12 68.29,32.12 J4.1
NetJ4_2: J4.2 R8.1 | length 8.9
  Top Layer w0.185: R8.1 68.213,33.425 68.763,33.975 J4.2
NetnHSig_1: nHSig.1 R8.2 R9.1 R12.2 U12.3 | length 7.7
  Top Layer w0.185: U12.3 55.171,33.425 R8.2
NetR36_1: R36.1 R39.2 U7.3 | length 2.4
  Top Layer w0.185: R39.2 28.345,25.135 R36.1 29.095,25.885 U7.3
NetR36_2: R36.2 R38.1 U7.2 | length 2.3
  Top Layer w0.185: R38.1 R36.2 29.095,26.385 U7.2
NetR41_1: R41.1 R44.2 U7.11 | length 2.4
  Top Layer w0.185: U7.11 33.795,26.385 R44.2 33.995,26.585 33.995,27.685 R41.1
NetR42_2: R42.2 R44.1 U7.10 | length 2.4
  Top Layer w0.185: U7.10 33.795,25.885 R44.1 34.545,25.135 R42.2
NetR48High_2: R48High.2 R51High.2 R52High.2
NetR48Low_2: R48Low.2 R51Low.2 R52Low.2
NetR62_1: R62.1 R64.1 R67.1 R69.1 U12.7
NetR63_1: R63.1 U12.6 | length 1.8
  Top Layer w0.185: R63.1 40.572,33.437 42.3,33.437 U12.6
PGND: C1.2 C2.2 C3.2 C4.2 C5.2 C6.2 C7.2 C8.2 C9.2 C10.2 G2.1 G2.2 G2.9 J2.1 J3.1 J3.2 R2.2 R48Low.1 Source.1 | length 6
  Top Layer w0.3: G2.9 38.259,54.325 Source.1
  other v1: 10.8,49.275 12.286,49.275 13.771,49.275 15.257,49.275 16.743,49.275 18.229,49.275 19.714,49.275 21.2,49.275 10.8,50.425 12.1,50.425 13.4,50.425 14.7,50.425 16,50.425 17.3,50.425 18.6,50.425 19.9,50.425 21.2,50.425 10.8,51.575 17.733,51.575 19.467,51.575 21.2,51.575 16,51.775 15.257,52.9 16.743,52.9 18.229,52.9 19.714,52.9 11.1,53.325 12.1,54.05 13.4,54.05 14.7,54.05 16,54.05 17.3,54.05 18.6,54.05 12.061,55.3 13.546,55.3 15.032,55.3 16.518,55.3 11.875,56.45 13.175,56.45 14.475,56.45 15.775,56.45
SW_NODE: C41.2 C45.2 C46.2 C52.1 C53.2 C56.1 C57.1 C58.1 C59.1 C60.1 C62.2 C66.1 G2.5 G2.6 G2.7 G2.8 J6.1 J13.1 J22.2 J22.3 J22.4 J22.5 J23.2 J23.3 J23.4 J23.5 R4.1 R10.1 R23.1 R25.1 R37.1 R41.2 R43.1 R45.1 R46.1 R47.1 R49.1 R50.1 R51High.1 R51Low.1 R52High.1 R52Low.1 R53.1 U6.1 U7.13 U7.14 U7.15 U7.16 U7.17 U7.18 U7.19 U7.20 U7.21 | length 4.3
  Top Layer w0.185: R46.1 32.149,30.6 31.825,30.6 31.66,30.435 31.66,29.575 32.135,29.1 33.5,29.1 33.6,29 33.6,28.98 R41.2
  other v1: 23.7,3 26.121,3 28.542,3 30.962,3 33.383,3 35.804,3 38.225,3 24.91,4.058 27.331,4.058 29.752,4.058 32.173,4.058 34.594,4.058 37.015,4.058 23.7,5.117 26.121,5.117 28.542,5.117 30.962,5.117 33.383,5.117 35.804,5.117 38.225,5.117 24.91,6.175 27.331,6.175 29.752,6.175 32.173,6.175 34.594,6.175 37.015,6.175 23.7,7.233 26.121,7.233 28.542,7.233 30.962,7.233 33.383,7.233 35.804,7.233 38.225,7.233 24.91,8.292 27.331,8.292 29.752,8.292 32.173,8.292 34.594,8.292 37.015,8.292 23.7,9.35 26.121,9.35 28.542,9.35 30.962,9.35 33.383,9.35 35.804,9.35 38.225,9.35 35.59,16.792 34.079,18.025 36.5,18.025 29.225,18.15 27.35,18.175 25.525,18.2 28.3,18.689 26.425,18.731 24.525,18.775 35.59,18.908 27.35,19.356 25.525,19.381 28.3,19.869 26.425,19.911 24.525,19.956 27.35,20.536 25.525,20.561 28.3,21.05 26.425,21.092 24.525,21.136 27.35,21.717 25.525,21.742 26.425,22.272 24.525,22.317 30.85,22.375 32.05,22.375 29.475,22.525 33.425,22.6 27.35,22.897 25.525,22.922 29.225,23.35 33.625,23.35 26.425,23.453 24.525,23.497 27.35,24.078 25.525,24.103 26.425,24.633 24.525,24.678 27.35,25.258 25.525,25.283 26.425,25.814 27.35,26.439 25.525,26.464 26.425,26.994 25.525,27.644 27.35,27.619 26.425,28.175 30.7,28.4 31.45,28.4 32.2,28.4 27.35,28.8 25.525,28.825 25.542,29.85 26.35,29.85 32.3,29.85 33.013,29.85 33.783,29.85 34.554,29.85 35.325,29.85 27.275,29.975 28.094,29.975 28.912,29.975 29.731,29.975 30.55,29.975 31,64.4 31.808,64.4 32.617,64.4 33.425,64.4 34.233,64.4 35.042,64.4 35.85,64.4 36.658,64.4 37.467,64.4 38.275,64.4 31.392,65.15 32.2,65.15 33.008,65.15 33.817,65.15 34.625,65.15 35.433,65.15 36.242,65.15 37.05,65.15 37.858,65.15 30.992,65.825 31.8,65.825 32.608,65.825 33.417,65.825 34.225,65.825 35.033,65.825 35.842,65.825 36.65,65.825 37.458,65.825 38.267,65.825 31.408,66.45 32.217,66.45 33.025,66.45 33.833,66.45 34.642,66.45 35.45,66.45 36.258,66.45 37.067,66.45 37.875,66.45 31.008,67.125 31.817,67.125 32.625,67.125 33.433,67.125 34.242,67.125 35.05,67.125 35.858,67.125 36.667,67.125 37.475,67.125 38.283,67.125
pads on no net: H_Gate.1 MH1.1 MH2.1 MH3.1 MH4.1 U7.1

## Polygon pours and split planes (outlines as drawn)
H_Drain on Top Layer "Top Layer-H_Drain" (solid, pour order 10): 9.475,42.475 11.775,31.2 13.14,30.464 14.474,31.2 15.52,34.952 19.204,37.75 25.35,37.75 26.346,37.75 29.04,40.125 38.65,40.125 38.65,41.8 39.125,42.475 39.125,44.025 9.475,44.025
PGND on Top Layer "PGND_L01_P053" (solid, pour order 53): 13.65,59.875 21.125,54.9 31.475,54.9 38.4,54.9 38.4,51.7 35,51.375 34.65,51.025 34.65,48.25 39.075,48.25 39.075,46.6 9.7,46.6 9.475,46.825 9.475,48.25 12.1,59.625
H_SS on Top Layer "Top Layer-H_SS" (solid, pour order 34): 43.823,27.075 45.675,22.625 45.675,9.4 48.15,9.4 48.175,9.375 48.175,25.775 45.675,28.275 40.975,28.275 40.35,28.9 39.163,29.937 39.163,29.958 37.1,30.954 37.1,33.825 35.275,33.825 35.25,33.85 35.225,32.175 36.15,31.85 36.15,29.925 38.6,27.075
H_Gate on Top Layer "H_GATE_L01_P013" (solid, pour order 13): 38.025,30.45 37.025,31.25 37.025,31.675 37.225,32.175 37.225,33.85 38.6,33.85 38.6,32.175 38.725,30.45
NetD1_2 on Top Layer "NETD1_2_L01_P021" (solid, pour order 21): 40.075,32.85 39.525,32.85 38.75,31.7 38.75,31.175 39.375,29.875 40.075,29.875
+5_SIG on Top Layer "+5_SIG_L01_P020" (solid, pour order 20): 51,31.2 51,30.175 62.742,24.85 70.5,24.85 70.55,24.9 70.525,24.925 70.525,27.15 62.981,27.15 55.85,29.527 55.85,31.275 55.575,31.55 54.825,31.55 54.7,31.425 54.7,30.9 53.102,30.9 52.694,31.2
SW_NODE on Top Layer "Top Layer-SW_NODE" (solid, pour order 68): 22.8,2.325 41.275,2.325 41.375,2.225 41.375,17.7 39.15,17.7 38.875,17.975 38.875,19.875 38.4,20.35 29.875,20.35 27.812,22.412 27.812,28.25 28.325,29.45 30.51,29.45 30.85,29.79 30.85,30.775 24.975,30.775 22.8,16.225
H_+V on Top Layer "H_+V_L01_P024" (solid, pour order 24): 41.725,31.325 41.175,30.775 41.175,28.475 45.675,28.475 48.3,25.85 48.3,17.9 50.225,17.9 51.175,16.6 52.7,16.6 59.175,15.25 59.175,24.6 43.25,31.325
SW_NODE on Top Layer "SW_NODE_L01_P055" (solid, pour order 55): 31.2,57.35 38.7,57.35 38.7,67.525 30.525,67.525 30.525,62.225 26.825,62.225 26.825,61.775 30.525,61.775
NetR48Low_2 on Top Layer "NETR48LOW_2_L01_P014" (solid, pour order 14): 28.144,61.415 28.144,60.94 27.944,59.54 26.944,59.54 26.794,60.94 26.794,61.415
+VIN on Top Layer "+VIN_L01_P049" (solid, pour order 49): 41.5,20.75 43.3,20.75 43.3,2.2 41.5,2.2
+5 on Top Layer "+5_L01_P048" (solid, pour order 48): 34.475,25.875 34.475,27.55 36.975,27.55 38.225,26.3 41.675,26.3 41.675,20.925 41.2,20.925 41.2,18.5 40.725,18.025 39.375,18.025 39.025,18.375 39.025,20.05 38.325,20.75 34.4,20.75 34.4,22.025 35,22.625 35,25.35
SW_NODE on Top Layer "SW_NODE_L01_P047" (solid, pour order 47): 30.55,28.75 30.35,28.55 30.35,27.25 30.45,27.15 32.45,27.15 32.55,27.25 32.55,28.55 32.35,28.75
H_+VIN on Top Layer "H_+VIN_L01_P036" (solid, pour order 36): 48.475,17.725 50.025,17.725 51.175,16.575 52.6,16.575 59.125,15.2 59.125,9.4 48.441,9.4
H_SS on Top Layer "H_SS_L01_P032" (solid, pour order 32): 43.7,34.025 39.725,34.025 39.45,34.3 39.45,36.75 45.125,42.425 56.925,42.425 59.525,45.025 74.925,45.025 74.925,38.35 74.575,38 47.725,38 46.55,36.825
H_-VIN on Top Layer "H_-VIN_L01_P031" (solid, pour order 31): 62.075,40.425 74.925,40.425 74.925,42.475 65.8,42.475 65.5,42.175 64.675,41.35 62.25,41.35 61.85,40.95 61.85,40.65
NetC15_1 on Top Layer "NETC15_1_L01_P030" (solid, pour order 30): 61.975,43.125 62.2,43.35 63.8,43.35 64.725,42.425 64.725,41.55 63.5,41.55 63.4,41.45 62.1,41.45 61.975,41.575
NetC12_1 on Top Layer "NETC12_1_L01_P029" (solid, pour order 29): 54.35,40.475 56.425,40.475 57.075,41.125 61.15,41.125 61.325,41.3 61.325,43.375 59.692,43.375 57.644,41.675 54.35,41.675
H_-V on Top Layer "H_-V_L01_P028" (solid, pour order 28): 41.125,36.951 41.125,34 43.725,34 47.725,38 61.775,38 61.775,41.025 57.3,41.025 56.25,39.975 56.225,40 46.325,40 45.975,40.35 45.975,40.525 45.775,40.725 44.899,40.725 44.75,40.576 44.75,38.575 43.425,37.25 41.733,37.25
H_SS on Top Layer "H_SS_L01_P027" (solid, pour order 27): 56.725,23.775 58.3,23.775 58.3,22.075 58.325,22.05 56.725,22.05
NetC11_1 on Top Layer "NETC11_1_L01_P023" (solid, pour order 23): 50.75,19.7 50.75,23.675 52.375,24.25 53.725,24.925 55.5,24.925 56.487,23.813 56.487,22.162 52.375,19.7 52.35,19.7
NetR62_1 on Top Layer "NETR62_1_L01_P022" (solid, pour order 22): 40.287,32.787 40.35,32.85 40.875,32.85 43.071,32.464 43.15,32.37 43.15,31.925 43,31.775 42,31.775 40.975,30.75 40.975,29.9 40.312,29.9
GND_SIG on Top Layer "GND_SIG_L01_P018" (solid, pour order 18): 50.9,34.968 50.9,34.475 50.9,34.251 51.186,33.963 54.678,33.952 54.678,34.65 55.512,34.65 56.1,34.548 60.4,33.803 60.4,31.716 56.1,30.933 56.1,29.715 63.05,27.325 70.525,27.325 70.525,35.379 60.6,35.379 51.309,35.379
NetR48High_2 on Top Layer "NETR48HIGH_2_L01_P011" (solid, pour order 11): 26.4,33.05 26.575,31.525 26.575,31.125 25.075,31.125 25.075,31.525 25.4,33.05
SW_NODE on Top Layer "SW_NODE_L01_P007" (solid, pour order 7): 28.975,24.175 29.5,24.175 29.5,23.075 29.7,22.875 33.15,22.875 33.375,23.1 33.375,24.175 33.9,24.175 33.9,22.45 33.2,21.75 29.75,21.75 28.975,22.525
+5 on Top Layer "+5_L01_P006" (solid, pour order 6): 29.825,23.275 29.825,24.375 30.575,25.125 32.375,25.125 33.075,24.425 33.075,23.275
SW_NODE on Top Layer "NONET_L-01_P-001" (solid, pour order 3): 31.975,30.837 31.975,29.76 32.235,29.5 35.36,29.5 35.7,29.84 35.7,30.837
H_Source on Top Layer "H_SOURCE_L01_P001" (solid, pour order 1): 27.125,31.131 27.125,32.325 31.375,36.575 31.375,37.7 38.5,37.7 38.5,34.392 34.775,34.175 34.775,32.1 35.725,31.55 35.725,31.107
H_Drain on Bottom Layer "H_DRAIN_L04_P056" (solid, pour order 56): 7.4,42.85 10.689,42.85 11.639,44.05 23.75,44.05 23.75,42.7 22.209,37.75 19.161,37.75 15.537,34.937 14.475,31.175 13.125,30.475 11.775,31.175 10.15,39.075 7.4,41.65
PGND on Bottom Layer "PGND_L04_P057" (solid, pour order 57): 23.75,50.604 23.75,46.625 11.558,46.625 10.908,47.725 7.4,47.725 7.4,48.975 10.908,54.775 12.1,59.675 13.736,59.937 19.225,53.9
H_SS on Bottom Layer "Bottom Layer-H_SS" (solid, pour order 41): 43.823,27.075 45.675,22.625 45.675,9.4 59.175,9.4 59.175,15.25 59.175,24.6 45.875,30.216 45.875,36.162 46.55,36.825 47.725,38 74.575,38 74.925,38.35 74.925,45.025 59.525,45.025 56.9,42.4 45.1,42.4 39.45,36.75 39.45,34.3 39.46,34.29 39.425,33.85 36.85,33.825 35.275,33.825 35.25,33.85 35.225,32.175 36.15,31.85 36.15,29.925 38.6,27.075
SW_NODE on Bottom Layer "Bottom Layer-SW_NODE" (solid, pour order 69): 22.8,2.325 41.275,2.325 41.275,26.3 38.225,26.3 36.975,27.55 35.7,27.55 35.7,30.809 34.75,32.1 34.75,33.8 38.7,57.35 38.7,62.261 38.7,67.525 30.443,67.525 26.55,30.775 24.975,30.775 22.8,16.225
+5 on Bottom Layer "+5_L04_P044" (solid, pour order 44): 29.85,23.275 29.85,24.425 30.575,25.15 30.6,25.125 32.425,25.125 32.425,27.075 32.9,27.55 36.975,27.55 38.225,26.3 41.65,26.3 41.65,20.95 41.2,20.95 41.2,18.475 40.75,18.025 39.375,18.025 39.025,18.375 39.025,20.05 38.325,20.75 34.4,20.75 34.4,22 33.15,23.25
GND_SIG on Bottom Layer "GND_SIG_L04_P017" (solid, pour order 17): 50.575,34.642 50.575,30.594 51,30.169 62.747,24.844 70.525,24.844 70.525,35.379 60.6,35.379 51.309,35.379
H_SS on Layer 2 "Layer 2-H_SS" (solid, pour order 40): 43.823,27.075 45.675,22.625 45.675,9.4 59.175,9.4 59.175,15.25 59.175,24.6 45.875,30.216 45.875,36.162 46.55,36.825 47.725,38 74.575,38 74.925,38.35 74.925,45.025 59.525,45.025 56.9,42.4 45.1,42.4 39.45,36.75 39.45,34.3 39.46,34.29 39.425,33.85 36.85,33.825 35.275,33.825 35.25,33.85 35.225,32.175 36.15,31.85 36.15,29.925 38.6,27.075
SW_NODE on Layer 2 "Bottom Layer-SW_NODE" (solid, pour order 63): 22.8,2.325 41.275,2.325 41.275,26.3 38.225,26.3 36.975,27.55 35.7,27.55 35.7,30.809 34.75,32.1 34.75,33.8 38.7,57.35 38.7,62.261 38.7,67.525 30.443,67.525 26.55,30.775 24.975,30.775 22.8,16.225
GND_SIG on Layer 2 "GND_SIG_L03_P015" (solid, pour order 15): 50.575,34.642 50.575,30.594 51,30.169 62.747,24.844 70.525,24.844 70.525,35.379 60.6,35.379 51.309,35.379
H_SS on Layer 1 "Layer 1-H_SS" (solid, pour order 39): 43.823,27.075 45.675,22.625 45.675,9.4 59.175,9.4 59.175,15.25 59.175,24.6 45.875,30.216 45.875,36.162 46.55,36.825 47.725,38 74.575,38 74.925,38.35 74.925,45.025 59.525,45.025 56.9,42.4 45.1,42.4 39.45,36.75 39.45,34.3 39.46,34.29 39.425,33.85 36.85,33.825 35.275,33.825 35.25,33.85 35.225,32.175 36.15,31.85 36.15,29.925 38.6,27.075
SW_NODE on Layer 1 "Bottom Layer-SW_NODE" (solid, pour order 70): 22.8,2.325 41.275,2.325 41.275,26.3 38.225,26.3 36.975,27.55 35.7,27.55 35.7,30.809 34.75,32.1 34.75,33.8 38.7,57.35 38.7,62.261 38.7,67.525 30.443,67.525 26.55,30.775 24.975,30.775 22.8,16.225
+5_SIG on Layer 1 "+5_SIG_L02_P019" (solid, pour order 19): 50.575,34.642 50.575,30.594 51,30.169 62.747,24.844 70.525,24.844 70.525,35.379 60.6,35.379 51.309,35.379

## Other copper
Top Layer:
  pour cut-out: 26.744,31 26.744,29.769 26.475,29.5 25.281,29.5 24.803,29.978 24.65,29.331 24.65,29.225 26.5,29.225 26.969,29.694 26.969,31
  pour cut-out: 67.925,33.276 69.825,33.95 69.825,32.1 60.3,32.1 60.3,33.276
  pour cut-out: 62.15,43.55 61.975,43.125 61.95,41.2 61.325,41.2 61.325,43.575
  pour cut-out: 31.75,18.775 31.75,15.55 31.15,15.55 31.15,18.775
Layer 1:
  pour cut-out: 49.039,17.725 50.025,17.725 50.366,17.384 50.225,17.9 49.057,17.9

## Silkscreen, mask and mechanical layers (free items; w line width, h text height)
Top Overlay:
  drawing of 29 lines, arcs and shapes, not listed
  text "PGND" at 18.271,64.771 h1.52 r180
  text "ENPH479 - GaN Power 2256 / February 2023 / Adam B, Ben O, Dave N" at 42.525,63.025 h1
  text "H" at 47.175,42.024 h25.4
  text "VGate-" at 76.125,41.251 h0.8 r90
  text "SS" at 76.125,38.484 h0.8 r90
  text "V-" at 71.65,33.534 h0.8 r90
  text "V+" at 71.7,30.809 h0.8 r90
  text "SGND" at 71.575,26.884 h0.8 r90
  text "VDD" at 15.104,26.529 h1.52
  text "S +5V" at 67.559,23.75 h0.8
  text "Ids measurement / 30.9mV/A" at 19.875,19.8 h0.8 r270
  text "V-" at 26.775,8.95 h0.8
  text "V+" at 33.975,8.875 h0.8
  text "+7V,8V" at 45.583,2.225 h0.8 r90
  text "Floating supply" at 41.8,1.117 h0.5
  text "SW_NODE" at 34.825,1.008 h0.8
Bottom Overlay:
  text "x" at 1,7.249 h25.4
  text "e" at 66.525,0.474 h25.4
Board Shape:
  lines w1.2: 0.025,0 0.025,71.2 79.3,71.2 79.3,0 0.025,0

## Text inside footprints (layer, text, board x,y; h text height)
C41: Top Overlay "+" at 45.283,8.512 h1.5 r180
HSig: Top Overlay "(+)" at 56.625,31.326 h0.8
nHSig: Top Overlay "(-)" at 57.425,33.526 h0.8
SigGND2: Top Overlay "Sig_GND" at 61.1,35.575 h0.8
SigGND4: Top Overlay "Sig_GND" at 60.675,30 h0.8
Source: Top Overlay "L_Source" at 39.35,52.717 h0.8